# EAGLE board MINI-BIVERT-MOD_DMG-01 (EAGLE 8.5.0)
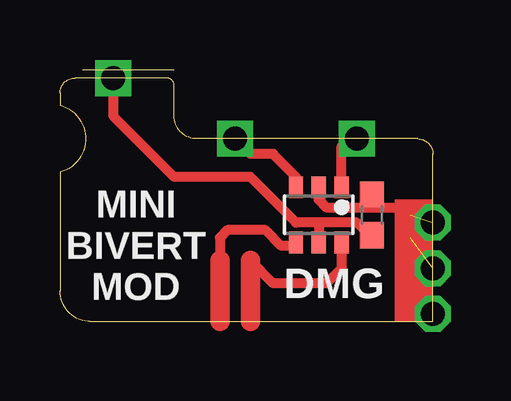
[diagram p0: board, top side]
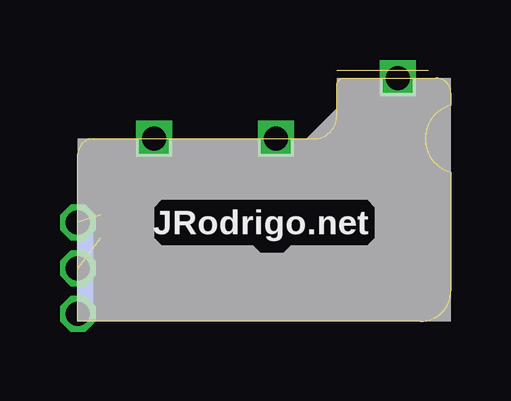
[diagram p1: board, bottom side, seen from below]

Size 15.56 x 10.48 mm. Coordinates in mm from the lower left corner, seen from the top.
Outline: 4.76,10.48 0.95,10.48
Outline: 1.27,0 15.56,0 15.56,6.99 arc90 14.92,7.62 5.71,7.62 arc-90 4.76,8.57 4.76,9.84 arc90 4.45,10.16 0.64,10.16 arc90 0,9.53 0,9.02 arc-150 0,6.22 0,1.27 arc90 1.27,0
Copper layers (1*16): Top 0.035mm / dielectric 1.5mm / Bottom 0.035mm
Design rules "default": minimum track width 6mil, minimum drill 0.35mm, track to track 6mil, track to pad 6mil, pad to pad 6mil, via to via 6mil, smd to smd 6mil, copper to edge 40mil, drill to drill 6mil, minimum pad ring 10mil, minimum via ring 8mil, stop-mask expansion 4mil, vias tented up to drill 0mil, thermal gap 10mil

## Footprints (pad centres in the part's own frame; a part is rotated, then mirrored left to right if it is on the bottom)
C0603 = smd 1.1 x 1: 1 -0.85,0; 2 0.85,0
SOT23-6 = smd 0.6 x 0.9: 1 -0.95,-1.15; 2 0,-1.15; 3 0.95,-1.15; 4 0.95,1.15; 5 0,1.15; 6 -0.95,1.15

## Placement (x,y rotation side)
C  100nF  [C0603]  13.02,4.45 90 top
INV  SN74LVC2G04  [SOT23-6]  10.79,4.45 180 top

## Library data of the parts
C = rcl
INV = linear

## Tracks (layer width: path | path; a pad name or v marks a point on that pad's centre or on a via)
A1  (via drill 1)
  Top 0.406: 9.84,5.71 9.84,6.03 8.89,6.99 7.94,6.99 v7.3,7.62
A2  (via drill 1)
  Top 0.406: 11.75,5.71 11.75,7.3 v12.38,7.62
GND  (via drill 1)  (2 unrouted)
  Top 0.406: 10.79,5.4 10.79,5.08 11.11,4.76 14.29,4.76 14.61,4.45 14.61,3.49
  other vias: 15.56,2.22 15.56,4.13
S$5  (via drill 1)
  other vias: 15.56,0.32
VCC  (via drill 1)
  Top 0.406: v2.22,10.16 2.22,8.57 4.76,6.03 7.94,6.03 9.84,4.13 10.79,4.13 | 10.79,4.13 10.79,3.49 | 13.02,3.49 12.38,4.13 10.79,4.13
Y1
  Top 0.406: 6.67,2.54 6.67,3.49 6.99,3.81 8.57,3.81 9.21,3.17 9.84,3.17
  Top 0.813: 6.67,0 6.67,2.54
Y2
  Top 0.406: 11.75,3.17 11.75,2.22 11.11,1.59 8.89,1.59 7.94,2.54
  Top 0.813: 7.94,0 7.94,2.54
(copper drawn outside any net)
  shapes: Bottom area x1, Top area x1

## Text on the board
tPlace: MINI / BIVERT / MOD | DMG
bPlace: JRodrigo.net